# Altium PCB PCB1.PcbDoc (part 4 of 4)
Units mil, origin at the board's own origin, x right, y up, seen from the top; angles counter-clockwise.
Board outline 6000 x 4000 mil, 2 copper layers (Top Layer, Bottom Layer); 419 components, 314 nets, 2127 pads, 9 vias.
Unrouted connection lines stored in the file: 1258.
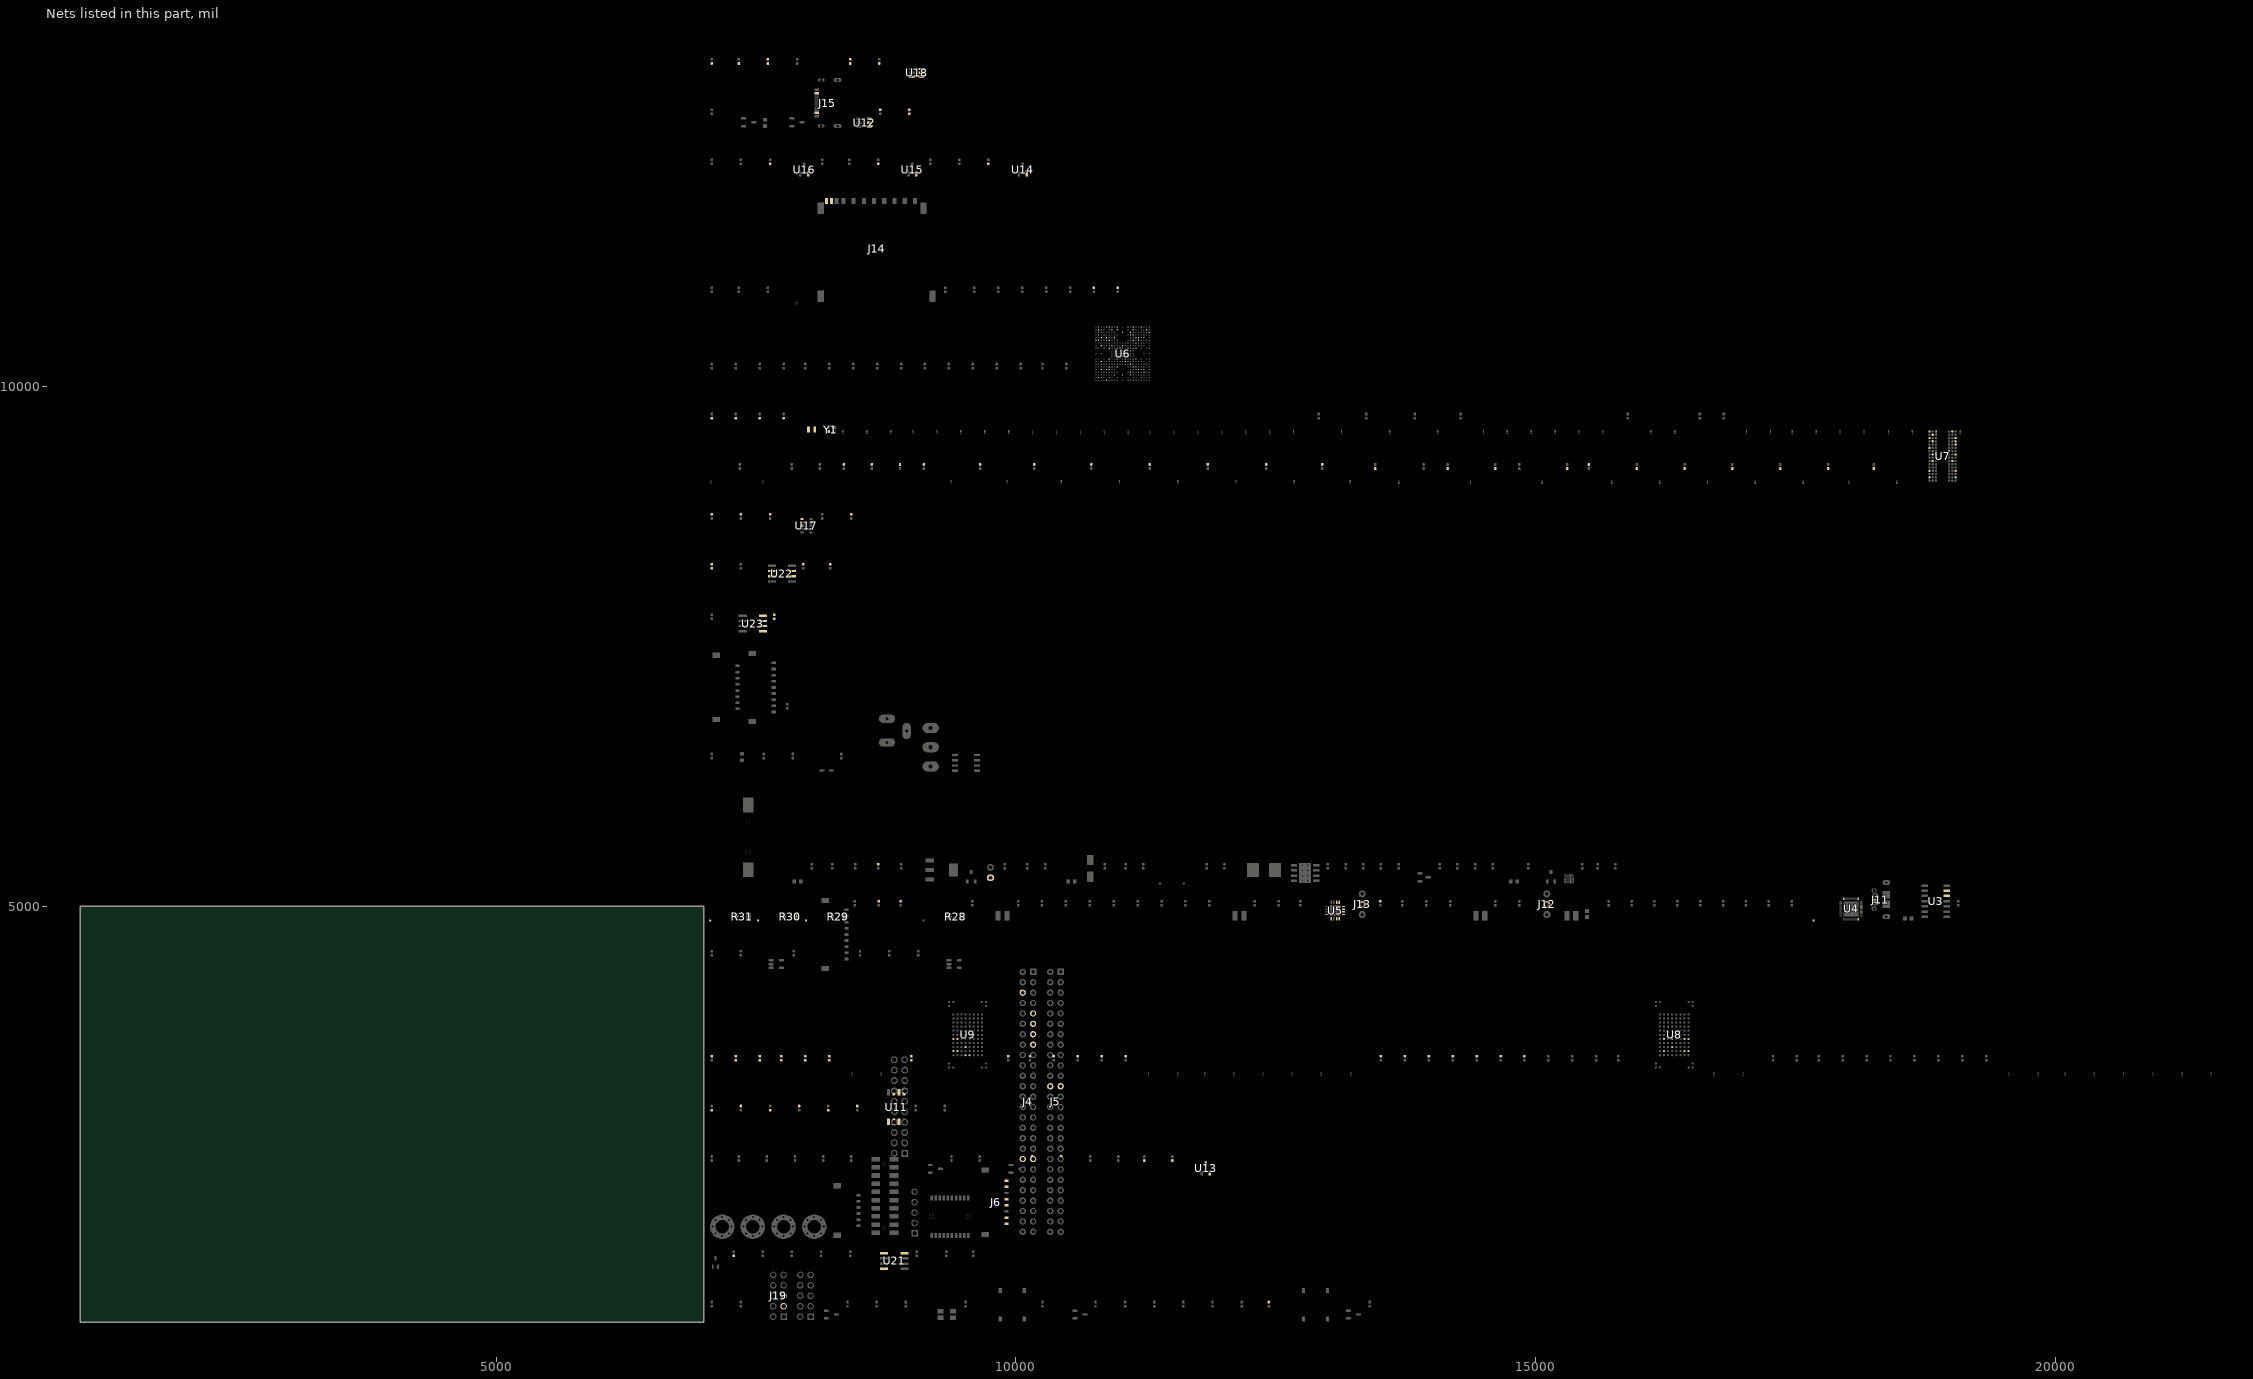
[diagram p3: the nets of this part, all layers, seen from the top]

## Via types
v1: diameter 21.65, hole 11.81, Top Layer to Bottom Layer, 9 vias

## Nets (pads, with @x,y where several pads share a name; then routed paths per layer and width w, separated by ;. In a path a pad name is that pad's centre, name@x,y a point inside that pad or via, vN(x,y) a via of type N, cw(c..) or ccw(c..) an arc to the next point about the centre after c; other vN are vias at no path point) (continued)
NetR74_2: R74.2 U8.K3@16231.57,3725.63
NetR75_2: R75.2 U8.N3@16231.57,3607.52
NetR76_2: R76.2 U8.N8@16428.43,3607.52
NetR77_2: R77.2 U8.K8@16428.43,3725.63
NetR78_2: R78.2 U8.N9@16467.8,3607.52
NetR79_2: R79.2 U8.K9@16467.8,3725.63
NetR80_2: R80.2 U6.R14 U8.M5@16310.31,3646.89
NetR81_2: R81.2 R89.1 U6.B15
NetR82_2: R82.2 R90.1 U6.A13
NetR83_2: R83.2 R91.1 U6.A15
NetR84_2: R84.2 R92.1 U6.C11
NetR85_2: R85.2 R87.1 U6.D14
NetR86_2: R86.2 R88.1 U6.C14
NetR87_2: R87.2 U9.P6@9554.68,3568.15
NetR88_2: R88.2 U9.P5@9515.31,3568.15
NetR89_2: R89.2 U9.K2@9397.2,3725.63
NetR90_2: R90.2 U9.N2@9397.2,3607.52
NetR91_2: R91.2 U9.K3@9436.57,3725.63
NetR92_2: R92.2 U9.N3@9436.57,3607.52
NetR93_2: R93.2 U6.D15 U9.M5@9515.31,3646.89
NetR102_2: R102.2 U11.1
NetR103_2: R103.2 U11.2
NetR104_1: R104.1 U11.7
NetR105_2: R105.2 U11.3
NetR106_1: R106.1 U11.6
NetR107_1: R107.1 U11.5
NetR108_1: R108.1 R109.2 U6.K14
NetR122_1: R122.1 U14.2
NetR123_1: R123.1 U15.2
NetR124_1: R124.1 U16.2
NetR125_2: R125.2 U6.D4 U17.3
NetR126_2: R126.2 U6.J10 U17.7
NetR127_2: R127.2 U17.1
NetR128_1: R128.1 U18.6
NetR129_1: R129.1 U18.5
NetR129_2: R129.2 U6.A5
NetR130_1: R130.1 U18.4
NetR130_2: R130.2 U6.A2
NetR131_1: R131.1 SB2.1
NetR132_1: R132.1 SB2.2 U18.3
NetR139_1: R139.1 U21.8
NetR142_2: R142.2 U6.H7
NetR151_2: R151.2 R152.2 U6.C21 U22.2 U22.3
NetTP3_0: TP3.0 U4.22 U6.A6
NetU6_G16: U6.G16 U21.1
NetU6_H11: U6.H11 U21.4
NetU6_P12: U6.P12 U8.K5@16310.31,3725.63
PAC1934_TWCK: J12.2 U5.4
PAC1934_TWD: J13.2 U5.5
PAC_USB_N: J11.2 U3.12
PAC_USB_P: J11.3 U3.13
PD1: J14.11 R100.2 U6.A18
PD2: J14.10 R99.2 U6.G13
RS_422_RX_N: J4.11 J6.8 R154.2 U23.7
RS_422_RX_P: J4.09 J6.7 R154.1 U23.8
RS_422_TX_N: J4.15 J6.5 U23.6
RS_422_TX_P: J4.13 J6.4 U23.5
SENSE1_N: R28.4 U5.12
SENSE1_P: R28.3 U5.11
SENSE2_N: R29.4 U5.14
SENSE2_P: R29.3 U5.13
SENSE3_N: R30.4 U5.7
SENSE3_P: R30.3 U5.8
SENSE4_N: R31.4 U5.9
SENSE4_P: R31.3 U5.10
STX_12V: J5.23 J5.24
STX_GPIO_EN: J4.06 U6.V14
STX_RS485_N: J4.37 J6.2 R153.1 U22.7
STX_RS485_P: J4.38 J6.1 R153.2 U22.6
USBA_N: U6.F1 U12.6
USBA_P: U6.F2 U12.4
USBA_VBUS_5V: J15.A4_B9 J15.B4_A9 R108.2 U12.5
VBAT: C14.2 C73.2 C155.2 J3.1 J19.3 J19.5 R21.2 U6.E8 U17.9
VBUS_FTDI: C147.2 U13.2
VDD_3V3_FTDI: C146.2 R112.1 R113.1 U13.3
VDDCORE: C39.2 C40.2 C41.2 C42.2 C43.2 C44.2 C45.2 C46.2 C47.2 C48.2 C49.2 C50.2 C51.2 C52.2 C53.2 C54.2 R30.2 TP6.0 U4.25 U6.B2 U6.F6 U6.F15 U6.H3 U6.J9 U6.J13 U6.J16 U6.N13 U6.N16 U6.T15 U6.U16 U6.U17 U6.U19 U6.V19
VDDCPU: C33.2 C34.2 C35.2 C36.2 C37.2 C38.2 R31.2 TP7.0 U4.32 U6.B20 U6.E16 U6.E17 U6.E19 U6.F17
VDDIODDR: C78.1 C79.1 C80.1 C81.1 C82.1 C83.1 C84.1 C85.1 C86.1 C87.1 C88.1 C89.1 C90.1 C91.1 C92.1 C93.1 C94.1 C96.1 C97.1 C98.1 C99.2 C100.2 C101.2 C102.2 C103.2 C104.2 C105.2 C106.2 C107.2 C108.2 C109.2 C110.2 C111.2 C112.2 C113.2 C114.2 C115.2 C116.2 R29.2 R55.2 R57.2 TP5.0 U4.16 U6.AA5 U6.M11 U6.N6 U6.N9 U6.N12 U6.P3 U6.P13 U6.T6 U6.T7 U6.T9 U6.U3 U6.U5 U6.U6 U6.W8 U6.Y2 U7.A1 U7.A8 U7.B2 U7.C1 U7.C9 U7.D2 U7.D9 U7.E9 U7.F1 U7.G7 U7.H2 U7.H9 U7.K2 U7.K8 U7.N1 U7.N9 U7.R1 U7.R9
VDDOUT25: C66.2 C67.2 C68.2 C69.2 C70.2 C71.2 C72.2 U6.D2 U6.E3 U6.E5 U6.J6 U6.T16 U6.W11 U6.W14
VLDO1: C31.2 U4.19
VLDO2: C32.2 U4.21
XIN24M: C74.1 U6.B7 Y1.1
XIN32K: C76.1 U6.A9 Y2.1
XOUT24M: C75.1 U6.A7 Y1.3
XOUT32K: C77.1 U6.B9 Y2.2
pads on no net: BT1. J4.02 J4.04 J4.05 J4.07 J4.08 J4.10 J4.12 J4.14 J4.16 J4.17 J4.18 J4.20 J4.22 J4.24 J4.26 J4.27 J4.28 J4.29 J4.30 J4.31 J4.32 J4.33 J4.34 J4.35 J4.36 J4.45 J4.46 J4.47 J4.48 J4.49 J4.50 J4.51 J4.52 J5.01 J5.02 J5.03 J5.04 J5.05 J5.06 J5.07 J5.08 J5.09 J5.10 J5.11 J5.12 J5.13 J5.14 J5.15 J5.16 J5.17 J5.18 J5.19 J5.20 J5.21 J5.22 J5.33 J5.34 J5.35 J5.36 J5.37 J5.38 J5.39 J5.40 J5.41 J5.42 J5.43 J5.44 J5.49 J5.50 J5.51 J5.52 J7. J7.09 J7.10 J7.11 J7.12 J7.13 J7.14 J7.15 J7.16 J9. J9.1 J9.3 J9.4 J9.5 J9.6 J9.7 J9.8 J9.9 J9.15 J9.17 J9.20 J10.4 J11.1 J11.4 J14.1.5mm J15.A8 J15.B8 J17.17 J17.19 J18.3 J18.4 J18.8 J18.9 J19.8 SW1.3 U2.2 U2.3 U2.5 U3.2 U3.3 U3.7 U4.17 U6.A19 U6.AA15 U6.AA16 U6.AA19 U6.B1 U6.B19 U6.B21 U6.C3 U6.C6 U6.C18 U6.C19 U6.D5 U6.D6 U6.D18 U6.D19 U6.D20 U6.D21 U6.E6 U6.F3 U6.F7 U6.F8 U6.F18 U6.F19 U6.F20 U6.F21 U6.G1 U6.G2 U6.G3 U6.G4 U6.G12 U6.G18 U6.G19 U6.G20 U6.H4 U6.H6 U6.H12 U6.H15 U6.H16 U6.H17 U6.H18 U6.J11 U6.J12 U6.J14 U6.J15 U6.J20 U6.J21 U6.K8 U6.K9 U6.K10 U6.K12 U6.L14 U6.M10 U6.M12 U6.N15 U6.N20 U6.N21 U6.P10 U6.R10 U6.R20 U6.R21 U6.T20 U6.T21 U6.V18 U6.V20 U6.V21 U6.W18 U6.W20 U6.W21 U6.Y15 U6.Y16 U6.Y19 U6.Y20 U6.Y21 U7.J1 U7.J9 U7.L1 U7.L9 U8.A1 U8.A2 U8.A9 U8.A10 U8.B1 U8.B10 U8.D2 U8.D3 U8.D4 U8.D5 U8.D6 U8.D7 U8.D8 U8.D9 U8.E2 U8.E3 U8.E4@16270.94,3922.48 U8.E5 U8.E6 U8.E7 U8.E8 U8.E9 U8.F2@16192.2,3883.11 U8.F3@16231.58,3883.11 U8.F4@16270.94,3883.11 U8.F5@16310.32,3883.11 U8.F6@16349.68,3883.11 U8.F7@16389.06,3883.11 U8.F8@16428.42,3883.11 U8.F9@16467.79,3883.11 U8.G2@16192.2,3843.74 U8.G3@16231.58,3843.74 U8.G4@16270.94,3843.74 U8.G5@16310.32,3843.74 U8.G6@16349.68,3843.74 U8.G7@16389.06,3843.74 U8.G8@16428.42,3843.74 U8.G9@16467.79,3843.74 U8.H2@16192.2,3804.37 U8.H3@16231.58,3804.37 U8.H4 U8.H5 U8.H6 U8.H7 U8.H8@16428.42,3804.37 U8.H9@16467.79,3804.37 U8.J2 U8.J3 U8.J4 U8.J5@16310.32,3765 U8.J6 U8.J7 U8.J8 U8.J9 U8.K2@16192.2,3725.63 U8.K3@16231.58,3725.63 U8.K4 U8.K5@16310.32,3725.63 U8.K6 U8.K7 U8.K8@16428.42,3725.63 U8.K9@16467.79,3725.63 U8.L2@16192.2,3686.26 U8.L3@16231.58,3686.26 U8.L4@16270.94,3686.26 U8.L5 U8.L6 U8.L7@16389.06,3686.26 U8.L8@16428.42,3686.26 U8.L9@16467.79,3686.26 U8.M2 U8.M3 U8.M4@16270.94,3646.89 U8.M5@16310.32,3646.89 U8.M6 U8.M7@16389.06,3646.89 U8.M8 U8.M9 U8.N2@16192.2,3607.52 U8.N3@16231.58,3607.52 U8.N4 U8.N5 U8.N6 U8.N7 U8.N8@16428.42,3607.52 U8.N9@16467.79,3607.52 U8.P2@16192.2,3568.15 U8.P3@16231.58,3568.15 U8.P4 U8.P5@16310.32,3568.15 U8.P6@16349.68,3568.15 U8.P7 U8.P8@16428.42,3568.15 U8.P9@16467.79,3568.15 U8.T1 U8.T10 U8.U1 U8.U2 U8.U9 U8.U10 U9.A1 U9.A2 U9.A9 U9.A10 U9.B1 U9.B10 U9.D2 U9.D3 U9.D4 U9.D5 U9.D6 U9.D7 U9.D8 U9.D9 U9.E2 U9.E3 U9.E4@9475.94,3922.48 U9.E5 U9.E6 U9.E7 U9.E8 U9.E9 U9.F2@9397.2,3883.11 U9.F3@9436.58,3883.11 U9.F4@9475.94,3883.11 U9.F5@9515.32,3883.11 U9.F6@9554.68,3883.11 U9.F7@9594.06,3883.11 U9.F8@9633.42,3883.11 U9.F9@9672.8,3883.11 U9.G2@9397.2,3843.74 U9.G3@9436.58,3843.74 U9.G4@9475.94,3843.74 U9.G5@9515.32,3843.74 U9.G6@9554.68,3843.74 U9.G7@9594.06,3843.74 U9.G8@9633.42,3843.74 U9.G9@9672.8,3843.74 U9.H2@9397.2,3804.37 U9.H3@9436.58,3804.37 U9.H4 U9.H5 U9.H6 U9.H7 U9.H8@9633.42,3804.37 U9.H9@9672.8,3804.37 U9.J2 U9.J3 U9.J4 U9.J5@9515.32,3765 U9.J6 U9.J7 U9.J8 U9.J9 U9.K2@9397.2,3725.63 U9.K3@9436.58,3725.63 U9.K4 U9.K5 U9.K6 U9.K7 U9.K8 U9.K9 U9.L2@9397.2,3686.26 U9.L3@9436.58,3686.26 U9.L4@9475.94,3686.26 U9.L5 U9.L6 U9.L7@9594.06,3686.26 U9.L8@9633.42,3686.26 U9.L9@9672.8,3686.26 U9.M2 U9.M3 U9.M4@9475.94,3646.89 U9.M5@9515.32,3646.89 U9.M6 U9.M7@9594.06,3646.89 U9.M8 U9.M9 U9.N2@9397.2,3607.52 U9.N3@9436.58,3607.52 U9.N4 U9.N5 U9.N6 U9.N7 U9.N8 U9.N9 U9.P2@9397.2,3568.15 U9.P3@9436.58,3568.15 U9.P4 U9.P5@9515.32,3568.15 U9.P6@9554.68,3568.15 U9.P7 U9.P8@9633.42,3568.15 U9.P9@9672.8,3568.15 U9.T1 U9.T10 U9.U1 U9.U2 U9.U9 U9.U10 U17.8 U17.10

## Text inside footprints (layer, text, board x,y; h text height)
C33: Top Courtyard "C" at 19083.94,9557.05 h7.87 r90
C34: Top Courtyard "C" at 18853.94,9557.05 h7.87 r90
C35: Top Courtyard "C" at 18623.94,9557.05 h7.87 r90
C36: Top Courtyard "C" at 18393.94,9557.05 h7.87 r90
C37: Top Courtyard "C" at 18158.94,9557.05 h7.87 r90
C38: Top Courtyard "C" at 17928.94,9557.05 h7.87 r90
C39: Top Courtyard "C" at 17698.94,9557.05 h7.87 r90
C40: Top Courtyard "C" at 17468.94,9557.05 h7.87 r90
C41: Top Courtyard "C" at 17258.94,9557.05 h7.87 r90
C42: Top Courtyard "C" at 17028.94,9557.05 h7.87 r90
C43: Top Courtyard "C" at 16338.94,9557.05 h7.87 r90
C44: Top Courtyard "C" at 16108.94,9557.05 h7.87 r90
C45: Top Courtyard "C" at 15648.94,9557.05 h7.87 r90
C46: Top Courtyard "C" at 15418.94,9557.05 h7.87 r90
C47: Top Courtyard "C" at 15188.94,9557.05 h7.87 r90
C48: Top Courtyard "C" at 14958.94,9557.05 h7.87 r90
C49: Top Courtyard "C" at 14728.94,9557.05 h7.87 r90
C50: Top Courtyard "C" at 14498.94,9557.05 h7.87 r90
C51: Top Courtyard "C" at 14058.94,9557.05 h7.87 r90
C52: Top Courtyard "C" at 13598.94,9557.05 h7.87 r90
C53: Top Courtyard "C" at 13133.94,9557.05 h7.87 r90
C54: Top Courtyard "C" at 12673.94,9557.05 h7.87 r90
C55: Top Courtyard "C" at 12443.94,9557.05 h7.87 r90
C56: Top Courtyard "C" at 12213.94,9557.05 h7.87 r90
C57: Top Courtyard "C" at 11983.94,9557.05 h7.87 r90
C58: Top Courtyard "C" at 11753.94,9557.05 h7.87 r90
C59: Top Courtyard "C" at 11523.94,9557.05 h7.87 r90
C60: Top Courtyard "C" at 11293.94,9557.05 h7.87 r90
C61: Top Courtyard "C" at 11083.94,9557.05 h7.87 r90
C62: Top Courtyard "C" at 10853.94,9557.05 h7.87 r90
C63: Top Courtyard "C" at 10623.94,9557.05 h7.87 r90
C64: Top Courtyard "C" at 10393.94,9557.05 h7.87 r90
C65: Top Courtyard "C" at 10163.94,9557.05 h7.87 r90
C66: Top Courtyard "C" at 9933.94,9557.05 h7.87 r90
C67: Top Courtyard "C" at 9703.94,9557.05 h7.87 r90
C68: Top Courtyard "C" at 9473.94,9557.05 h7.87 r90
C69: Top Courtyard "C" at 9243.94,9557.05 h7.87 r90
C70: Top Courtyard "C" at 9013.94,9557.05 h7.87 r90
C71: Top Courtyard "C" at 8798.94,9557.05 h7.87 r90
C72: Top Courtyard "C" at 8568.94,9557.05 h7.87 r90
C73: Top Courtyard "C" at 8338.94,9557.05 h7.87 r90
C78: Top Courtyard "C" at 18473.94,9077.05 h7.87 r90
C80: Top Courtyard "C" at 18013.94,9077.05 h7.87 r90
C82: Top Courtyard "C" at 17573.94,9077.05 h7.87 r90
C84: Top Courtyard "C" at 17113.94,9077.05 h7.87 r90
C86: Top Courtyard "C" at 16653.94,9077.05 h7.87 r90
C88: Top Courtyard "C" at 16193.94,9077.05 h7.87 r90
C90: Top Courtyard "C" at 15733.94,9077.05 h7.87 r90
C92: Top Courtyard "C" at 15063.94,9077.05 h7.87 r90
C94: Top Courtyard "C" at 14373.94,9077.05 h7.87 r90
C97: Top Courtyard "C" at 13683.94,9077.05 h7.87 r90
C99: Top Courtyard "C" at 13218.94,9077.05 h7.87 r90
C101: Top Courtyard "C" at 12678.94,9077.05 h7.87 r90
C103: Top Courtyard "C" at 12118.94,9077.05 h7.87 r90
C105: Top Courtyard "C" at 11558.94,9077.05 h7.87 r90
C107: Top Courtyard "C" at 10998.94,9077.05 h7.87 r90
C109: Top Courtyard "C" at 10438.94,9077.05 h7.87 r90
C111: Top Courtyard "C" at 9918.94,9077.05 h7.87 r90
C113: Top Courtyard "C" at 9378.94,9077.05 h7.87 r90
C118: Top Courtyard "C" at 7568.94,9077.05 h7.87 r90
C119: Top Courtyard "C" at 7068.94,9077.05 h7.87 r90
C120: Top Courtyard "C" at 19553.94,3382.05 h7.87 r90
C121: Top Courtyard "C" at 19833.94,3382.05 h7.87 r90
C122: Top Courtyard "C" at 20093.94,3382.05 h7.87 r90
C123: Top Courtyard "C" at 20373.94,3382.05 h7.87 r90
C124: Top Courtyard "C" at 20653.94,3382.05 h7.87 r90
C125: Top Courtyard "C" at 20938.94,3382.05 h7.87 r90
C126: Top Courtyard "C" at 21218.94,3382.05 h7.87 r90
C127: Top Courtyard "C" at 21498.94,3382.05 h7.87 r90
C128: Top Courtyard "C" at 16713.94,3382.05 h7.87 r90
C129: Top Courtyard "C" at 16993.94,3382.05 h7.87 r90
C130: Top Courtyard "C" at 11278.94,3382.05 h7.87 r90
C131: Top Courtyard "C" at 11558.94,3382.05 h7.87 r90
C132: Top Courtyard "C" at 11818.94,3382.05 h7.87 r90
C133: Top Courtyard "C" at 12098.94,3382.05 h7.87 r90
C134: Top Courtyard "C" at 12378.94,3382.05 h7.87 r90
C135: Top Courtyard "C" at 12658.94,3382.05 h7.87 r90
C136: Top Courtyard "C" at 12938.94,3382.05 h7.87 r90
C137: Top Courtyard "C" at 13223.94,3382.05 h7.87 r90
C138: Top Courtyard "C" at 8428.94,3382.05 h7.87 r90
C139: Top Courtyard "C" at 8708.94,3382.05 h7.87 r90
J11: Top Assembly "1" at 18305.12,5005.94 h39.37 r90
J15: Mechanical 13 "PCB Edge" at 8343.66,12979.33 h32 r90
U3: Top Assembly "1" at 18710,5205 h39.37 r270
U4: Top Assembly "1" at 17940,5050 h30 r270
U6: Top Assembly "A1" at 10757.28,10544.33 h39.37
U8: Top Overlay "10" at 16534.72,4127.2 h50 r90; Top Overlay "1" at 16176.46,4135.08 h50 r90; Top Overlay "U" at 16015.04,3418.54 h50; Top Overlay "A" at 16011.1,4060.28 h50; Top Assembly "10" at 16532.17,4146.5 h50 r90; Top Assembly "1" at 16177.83,4146.5 h50 r90; Top Assembly "U" at 16002.5,3425.04 h50; Top Assembly "A" at 16002.5,4054.96 h50
U9: Top Overlay "10" at 9739.72,4127.2 h50 r90; Top Overlay "1" at 9381.46,4135.08 h50 r90; Top Overlay "U" at 9220.04,3418.54 h50; Top Overlay "A" at 9216.1,4060.28 h50; Top Assembly "10" at 9737.17,4146.5 h50 r90; Top Assembly "1" at 9382.83,4146.5 h50 r90; Top Assembly "U" at 9207.5,3425.04 h50; Top Assembly "A" at 9207.5,4054.96 h50